# Altium PCB PCB1.PcbDoc
Units mil, origin at the board's own origin, x right, y up, seen from the top; angles counter-clockwise.
Board outline 6000 x 4000 mil, 2 copper layers (Top Layer, Bottom Layer); 7 components, 32 nets, 174 pads, 0 vias.
Unrouted connection lines stored in the file: 112.
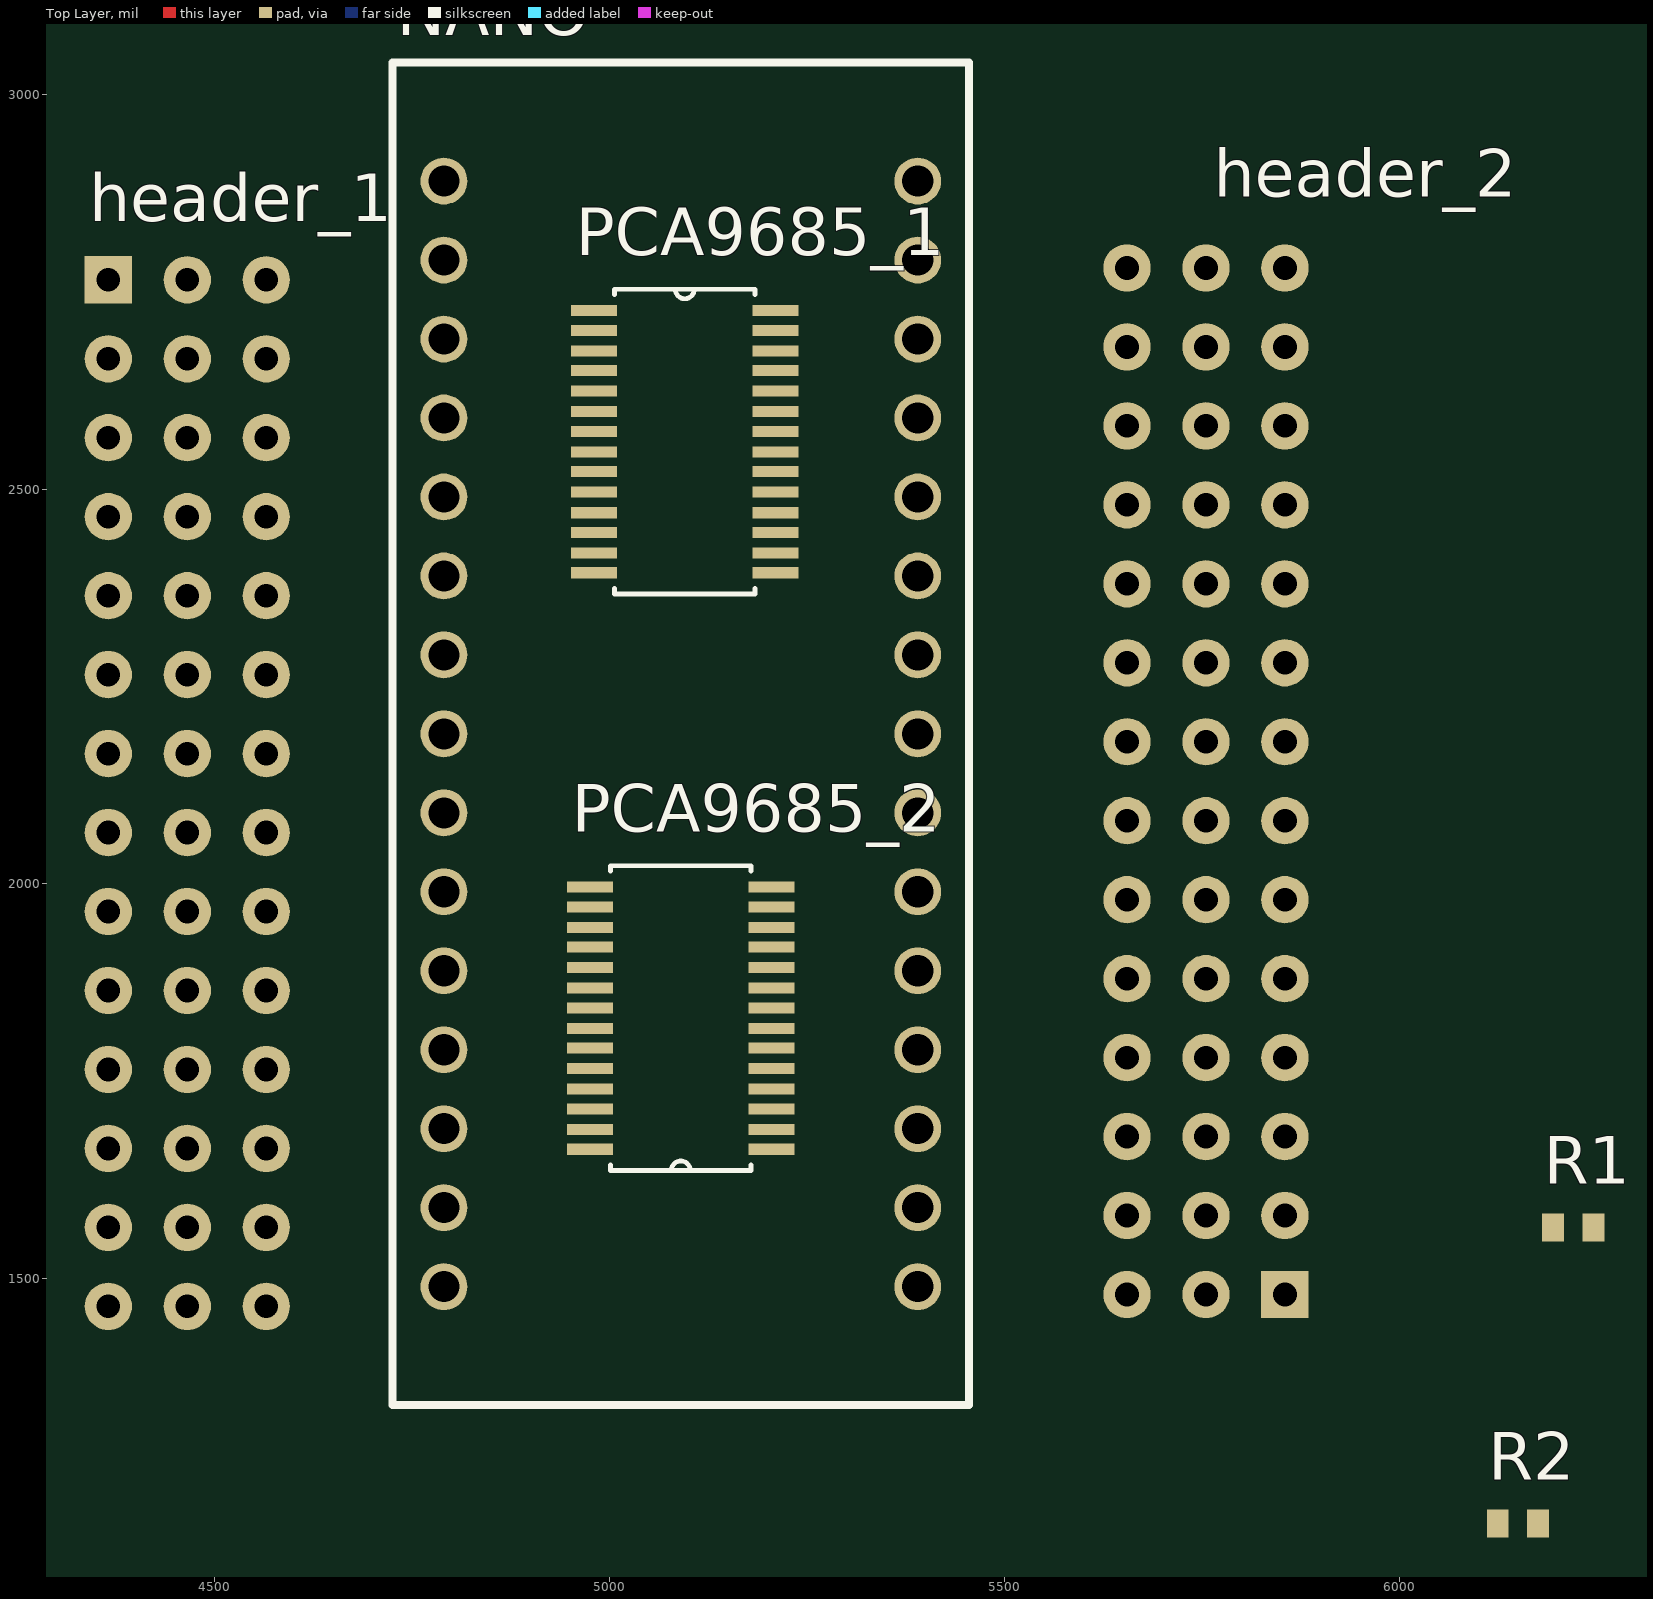
[diagram p0: Top Layer view]
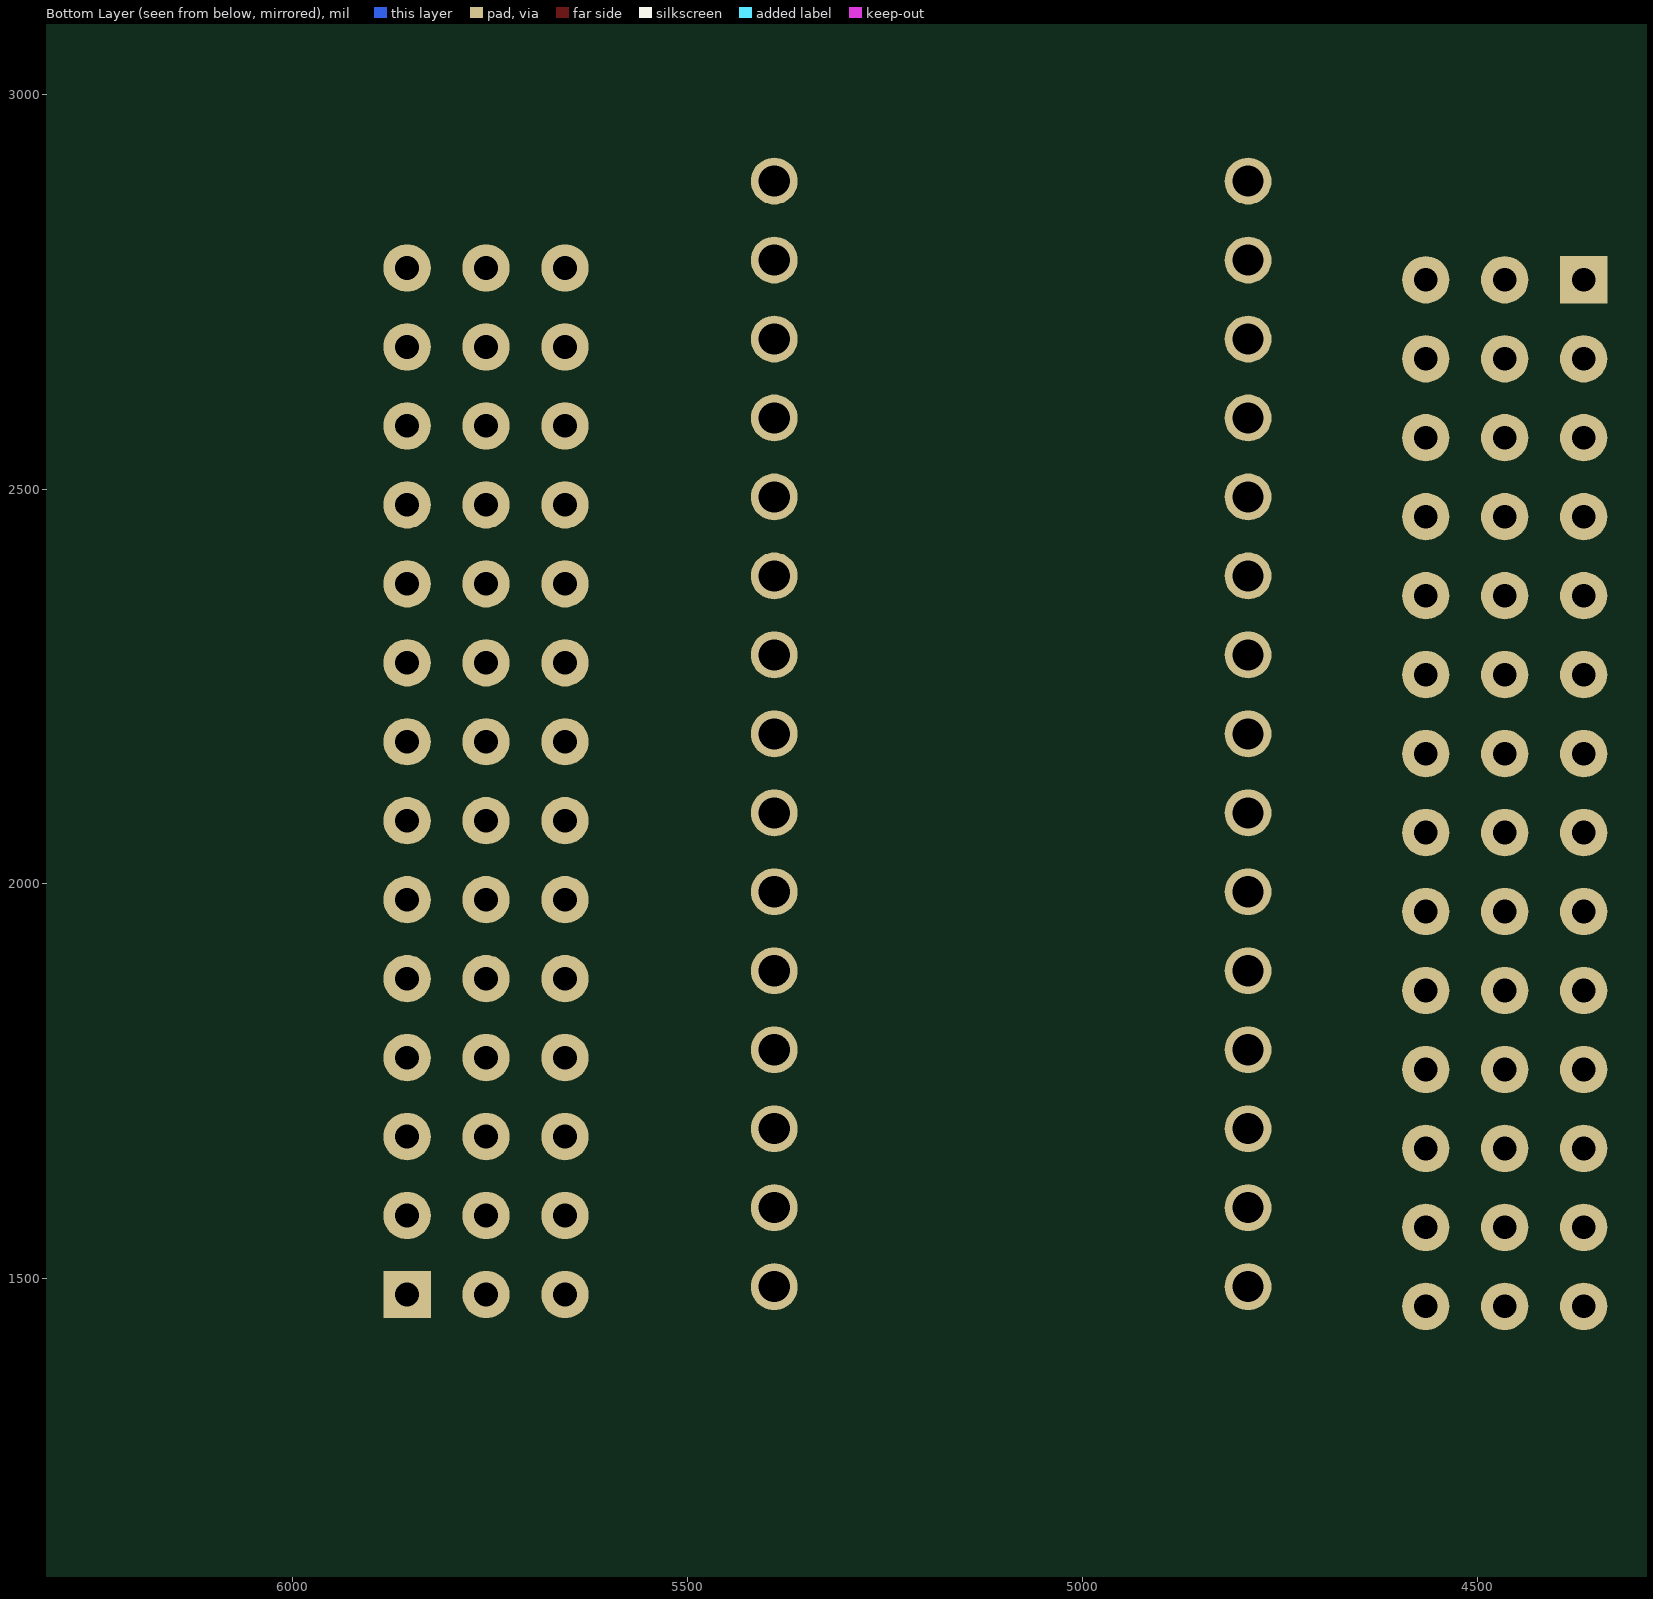
[diagram p1: Bottom Layer view, seen from below]

## Layer stack, top to bottom
Top Solder: solder mask 0.4, Solder Resist, Dk 3.5
Top Layer: signal copper 1.4
Dielectric 1: dielectric 12.6, FR-4, Dk 4.8
Bottom Layer: signal copper 1.4
Bottom Solder: solder mask 0.4, Solder Resist, Dk 3.5

## Board outline
1000,1000 7000,1000 7000,5000 1000,5000

## Design rules (kind name [scope] priority, off if disabled: settings)
Clearance [All] p1: gap=10 ignorepadtopadclearanceinfootprint=FALSE except(0: Arc-Hole Track-Hole SMDPad-Hole THPad-Hole Via-Hole Fill-Hole Poly-Hole Region-Hole Text-Hole)
PolygonConnect [All] p1: connectstyle=Relief reliefconductorwidth=10 reliefentries=4 polygonreliefangle="90 Angle" airgapwidth=10
RoomDefinition Sheet1 [InComponentClass('Sheet1')] p1: confinementstyle=ConfineIn formatcopy=TRUE lockcomponents=FALSE outline 7240.59,1130 9665.59,1130 9665.59,2950 7240.59,2950
RoutingVias [All] p1: holewidth=28 width=50 viastyle="Through Hole" minholewidth=28 minwidth=50 maxholewidth=28 maxwidth=50
SolderMaskExpansion [All] p1: expansion=4
Width [All] p1: maxlimit=10 minlimit=10 preferedwidth=10
30 further rules are at their usual default settings.

## Components (designator, comment, footprint, x,y, rotation, side; value= is the part's Value field where it differs from the comment)
header_1 "Component_1" PCBComponent_1 4470,2120 r270 top
header_2 "Component_1" PCBComponent_1 5750,2125 r90 top
NANO "ARDUINO_NANO" *ARDUINO_NANO 5090,2190 r0 top
PCA9685_1 "PCA9685" *SOP65P640X110-28N 5095,2560 r0 top
PCA9685_2 "PCA9685" *SOP65P640X110-28N 5090,1830 r180 top
R1 "RC0402JR-1310KL" *RESC1005X40 6220,1565 r0 top
R2 "RC0402JR-1310KL" *RESC1005X40 6150,1190 r0 top

## Footprints (in the part's own frame and the unit in brackets; to place one, negate y for a bottom-side part, rotate by r counter-clockwise, add the part's x,y. Pads: shape width x height; smd on the part's side, far side on the other; paste and mask are expansions set on the pad)
*ARDUINO_NANO [mm]
  round 1.508 hole 1: 1(-7.62,17.78) 2(-7.62,15.24) 3(-7.62,12.7) 4(-7.62,10.16) 5(-7.62,7.62) 6(-7.62,5.08) 7(-7.62,2.54) 8(-7.62,0) 9(-7.62,-2.54) 10(-7.62,-5.08) 11(-7.62,-7.62) 12(-7.62,-10.16) 13(-7.62,-12.7) 14(-7.62,-15.24) 15(-7.62,-17.78) 16(7.62,-17.78) 17(7.62,-15.24) 18(7.62,-12.7) 19(7.62,-10.16) 20(7.62,-7.62) 21(7.62,-5.08) 22(7.62,-2.54) 23(7.62,0) 24(7.62,2.54) 25(7.62,5.08) 26(7.62,7.62) 27(7.62,10.16) 28(7.62,12.7) 29(7.62,15.24) 30(7.62,17.78)
  silkscreen extent -9.27,-21.59 9.27,21.59
*RESC1005X40 [mm]
  rect 0.7x0.9 smd: 1(-0.65,0) 2(0.65,0)
*SOP65P640X110-28N [mil]
  rect 58x14 smd: 1(-115,166) 2(-115,141) 3(-115,115) 4(-115,90) 5(-115,64) 6(-115,38) 7(-115,13) 8(-115,-13) 9(-115,-38) 10(-115,-64) 11(-115,-90) 12(-115,-115) 13(-115,-141) 14(-115,-166) 15(115,-166) 16(115,-141) 17(115,-115) 18(115,-90) 19(115,-64) 20(115,-38) 21(115,-13) 22(115,13) 23(115,38) 24(115,64) 25(115,90) 26(115,115) 27(115,141) 28(115,166)
  silkscreen extent -89,-193 89,193
PCBComponent_1 [mil]
  rect 60x60 hole 30: 1(-645,-105)
  round 60 hole 30: 2(-645,-5) 3(-645,95) 4(-545,-105) 5(-545,-5) 6(-545,95) 7(-445,-105) 8(-445,-5) 9(-445,95) 10(-345,-105) 11(-345,-5) 12(-345,95) 13(-245,-105) 14(-245,-5) 15(-245,95) 16(-145,-105) 17(-145,-5) 18(-145,95) 19(-45,-105) 20(-45,-5) 21(-45,95) 22(55,-105) 23(55,-5) 24(55,95) 25(155,-105) 26(155,-5) 27(155,95) 28(255,-105) 29(255,-5) 30(255,95) 31(355,-105) 32(355,-5) 33(355,95) 34(455,-105) 35(455,-5) 36(455,95) 37(555,-105) 38(555,-5) 39(555,95) 40(655,-105) 41(655,-5) 42(655,95)

## Part data
NANO: "Dev.kit: Arduino; UART; ICSP, USB B mini, pin strips", Package=None, Availability=Unavailable, MF=Arduino, MP="ARDUINO NANO", Price=None, SnapEDA_Link=https://www.snapeda.com/parts/ARDUINO%20NANO/Arduino/view-part/?ref=snap
PCA9685_1 PCA9685_2: library part PCA9685PW,118, "PCA9685 Series 5.5V 25 mA 1 MHz 12-bit PWM Fm+I2C-Bus LED Controller - TSSOP-28", Package="TSSOP-28 NXP Semiconductors", Availability=Unavailable, MF="NXP USA", MP=PCA9685PW,118, Price=None, SnapEDA_Link=https://www.snapeda.com/parts/PCA9685PW%2C118/NXP%20USA%20Inc./view-part/?ref=snap
R1 R2: "Res, Thick Film, 10k, 5%, 0.0625w, 0402", Package="0402 Yageo", Availability=Unavailable, MF=Yageo, MP=RC0402JR-1310KL, Price=None, SnapEDA_Link=https://www.snapeda.com/parts/RC0402JR-1310KL/Yageo/view-part/?ref=snap

## Nets (pads, with @x,y where several pads share a name; then routed paths per layer and width w, separated by ;. In a path a pad name is that pad's centre, name@x,y a point inside that pad or via, vN(x,y) a via of type N, cw(c..) or ccw(c..) an arc to the next point about the centre after c; other vN are vias at no path point)
GND: header_1.1 header_1.4 header_1.7 header_1.10 header_1.13 header_1.16 header_1.19 header_1.22 header_1.25 header_1.28 header_1.31 header_1.34 header_1.37 header_1.40 header_2.1 header_2.4 header_2.7 header_2.10 header_2.13 header_2.16 header_2.19 header_2.22 header_2.25 header_2.28 header_2.31 header_2.34 header_2.37 header_2.40 NANO.4 NANO.29 PCA9685_1.2 PCA9685_1.3 PCA9685_1.4 PCA9685_1.5 PCA9685_1.14 PCA9685_1.24 PCA9685_1.25 PCA9685_2.1 PCA9685_2.3 PCA9685_2.4 PCA9685_2.5 PCA9685_2.14 PCA9685_2.24 PCA9685_2.25
PWM_1: header_1.3 PCA9685_1.6
PWM_2: header_1.6 PCA9685_1.7
PWM_3: header_1.9 PCA9685_1.8
PWM_4: header_1.12 PCA9685_1.9
PWM_5: header_1.15 PCA9685_1.10
PWM_6: header_1.18 PCA9685_1.11
PWM_7: header_1.21 PCA9685_1.12
PWM_8: header_1.24 PCA9685_1.13
PWM_9: header_1.27 PCA9685_1.15
PWM_10: header_1.30 PCA9685_1.16
PWM_11: header_1.33 PCA9685_1.17
PWM_12: header_1.36 PCA9685_1.18
PWM_13: header_1.39 PCA9685_1.19
PWM_14: header_1.42 PCA9685_1.20
PWM_15: header_2.3 PCA9685_2.6
PWM_16: header_2.6 PCA9685_2.7
PWM_17: header_2.9 PCA9685_2.8
PWM_18: header_2.12 PCA9685_2.9
PWM_19: header_2.15 PCA9685_2.10
PWM_20: header_2.18 PCA9685_2.11
PWM_21: header_2.21 PCA9685_2.12
PWM_22: header_2.24 PCA9685_2.13
PWM_23: header_2.27 PCA9685_2.15
PWM_24: header_2.30 PCA9685_2.16
PWM_25: header_2.33 PCA9685_2.17
PWM_26: header_2.36 PCA9685_2.18
PWM_27: header_2.39 PCA9685_2.19
PWM_28: header_2.42 PCA9685_2.20
SCL: NANO.24 PCA9685_2.26 R1.1
SDA: NANO.23 PCA9685_1.27 PCA9685_2.27 R2.1
VCC: header_1.2 header_1.5 header_1.8 header_1.11 header_1.14 header_1.17 header_1.20 header_1.23 header_1.26 header_1.29 header_1.32 header_1.35 header_1.38 header_1.41 header_2.2 header_2.5 header_2.8 header_2.11 header_2.14 header_2.17 header_2.20 header_2.23 header_2.26 header_2.29 header_2.32 header_2.35 header_2.38 header_2.41 NANO.30 PCA9685_1.1 PCA9685_1.23 PCA9685_1.28 PCA9685_2.2 PCA9685_2.23 PCA9685_2.28 R1.2 R2.2
pads on no net: NANO.1 NANO.2 NANO.3 NANO.5 NANO.6 NANO.7 NANO.8 NANO.9 NANO.10 NANO.11 NANO.12 NANO.13 NANO.14 NANO.15 NANO.16 NANO.17 NANO.18 NANO.19 NANO.20 NANO.21 NANO.22 NANO.25 NANO.26 NANO.27 NANO.28 PCA9685_1.21 PCA9685_1.22 PCA9685_1.26 PCA9685_2.21 PCA9685_2.22